# EAGLE board 4-Bit Adding Machine (EAGLE 9.7.0)

Size 192.59 x 35.98 mm. Coordinates in mm from the lower left corner, seen from the top.
Outline: 0,0 192.59,0 192.59,35.98 0,35.98 0,0
Copper layers (1*16): Top 0.035mm / dielectric 1.5mm / Bottom 0.035mm
Design rules "default": minimum track width 6mil, minimum drill 0.35mm, track to track 6mil, track to pad 6mil, pad to pad 6mil, via to via 6mil, smd to smd 6mil, copper to edge 40mil, drill to drill 6mil, minimum pad ring 10mil, minimum via ring 8mil, stop-mask expansion 4mil, vias tented up to drill 0mil, thermal gap 10mil

## Footprints (pad centres in the part's own frame; a part is rotated, then mirrored left to right if it is on the bottom)
LEDRD254W60D565H860B_B = drill 0.981 pad 1.581: 1 -1.27,0; 2 1.27,0
LEDRD254W60D565H860B = drill 0.981 pad 1.581: 1 -1.27,0; 2 1.27,0
BATTERY-GENERIC = drill 1.118 pad 3.15 octagon: + 2.54,0; - -2.54,0
78B04ST = drill 0.8: 1 -3.81,-3.81; 2 -1.27,-3.81; 3 1.27,-3.81; 4 3.81,-3.81; 5 3.81,3.81; 6 1.27,3.81; 7 -1.27,3.81; 8 -3.81,3.81
DIP762W53P254L1969H508Q14B = drill 0.743 pad 1.343: 1 -3.81,7.62; 2 -3.81,5.08; 3 -3.81,2.54; 4 -3.81,0; 5 -3.81,-2.54; 6 -3.81,-5.08; 7 -3.81,-7.62; 8 3.81,-7.62; 9 3.81,-5.08; 10 3.81,-2.54; 11 3.81,0; 12 3.81,2.54; 13 3.81,5.08; 14 3.81,7.62

## Placement (x,y rotation side)
D1  BLUE  [LEDRD254W60D565H860B_B]  186.53,28.07 180 top
D2  BLUE  [LEDRD254W60D565H860B_B]  181.45,28.07 180 top
D3  BLUE  [LEDRD254W60D565H860B_B]  176.37,28.07 180 top
D4  BLUE  [LEDRD254W60D565H860B_B]  171.29,28.07 180 top
D5  RED  [LEDRD254W60D565H860B]  166.21,28.07 180 top
P1  BATTERYGENERIC  [BATTERY-GENERIC]  8.26,8.26 180 top
SW1  SPST-478B04ST  [78B04ST]  39.21,14.1 0 top
SW2  SPST-478B04ST  [78B04ST]  51.91,14.1 0 top
U1  74HC86_PDIP  [DIP762W53P254L1969H508Q14B]  68.42,14.1 90 top
U2  74HC86_PDIP  [DIP762W53P254L1969H508Q14B]  88.74,14.1 90 top
U3  74HC08_PDIP  [DIP762W53P254L1969H508Q14B]  109.06,14.1 90 top
U4  74HC08_PDIP  [DIP762W53P254L1969H508Q14B]  129.38,14.1 90 top
U5  74HC32_PDIP  [DIP762W53P254L1969H508Q14B]  149.7,14.1 90 top

## Library data of the parts
D1-D4 = Tinkercad; CATEGORY: Opto-Electronic; SUB-CATEGORY: LED; VALUE: LED_BLUE
D5 = Tinkercad; CATEGORY: Opto-Electronic; SUB-CATEGORY: LED; VALUE: LED_RED
P1 SW1 SW2 U1-U5 = Tinkercad

## Nets
P1+: P1.+ SW1.5 SW1.6 SW1.7 SW1.8 SW2.5 SW2.6 SW2.7 SW2.8 U1.14 U2.14 U3.14 U4.14 U5.14
P1-: D1.2 D2.2 D3.2 D4.2 D5.2 P1.- U1.7 U2.7 U3.7 U4.7 U5.7
U1_1A: SW2.4 U1.1 U3.1
U1_1B: SW1.4 U1.2 U3.2
U1_1Y: U1.3 U1.4
U1_2Y: D1.1 U1.6
U1_3A: SW2.3 U1.9 U3.4
U1_3B: SW1.3 U1.10 U3.5
U1_4Y: D2.1 U1.11
U2_1A: SW2.2 U2.1 U3.12
U2_1B: SW1.2 U2.2 U3.13
U2_1Y: U2.3 U2.4 U4.1
U2_2Y: D3.1 U2.6
U2_3A: SW2.1 U2.9 U4.4
U2_3B: SW1.1 U2.10 U4.5
U2_3Y: U2.8 U2.12 U4.9
U2_4B: U2.13 U4.10 U5.6
U2_4Y: D4.1 U2.11
U3_2Y: U3.6 U5.2
U3_3A: U1.13 U3.3 U3.9
U3_3B: U1.8 U1.12 U3.10
U3_3Y: U3.8 U5.1
U4_2Y: U4.6 U5.10
U5_1Y: U2.5 U4.2 U5.3
U5_2A: U4.3 U5.4
U5_2B: U3.11 U5.5
U5_3A: U4.8 U5.9
U5_3Y: D5.1 U5.8

## Tracks (layer width: path | path; a pad name or v marks a point on that pad's centre or on a via)
P1+  (13 unrouted)
P1-  (10 unrouted)
U1_1A  (2 unrouted)
U1_1B  (2 unrouted)
U1_1Y  (1 unrouted)
U1_2Y  (1 unrouted)
U1_3A  (2 unrouted)
U1_3B  (2 unrouted)
U1_4Y  (1 unrouted)
U2_1A  (2 unrouted)
U2_1B  (2 unrouted)
U2_1Y  (2 unrouted)
U2_2Y  (1 unrouted)
U2_3A  (2 unrouted)
U2_3B  (2 unrouted)
U2_3Y  (2 unrouted)
U2_4B  (2 unrouted)
U2_4Y  (1 unrouted)
U3_2Y  (1 unrouted)
U3_3A  (2 unrouted)
U3_3B  (2 unrouted)
U3_3Y  (1 unrouted)
U4_2Y  (1 unrouted)
U5_1Y  (2 unrouted)
U5_2A  (1 unrouted)
U5_2B  (1 unrouted)
U5_3A  (1 unrouted)
U5_3Y  (1 unrouted)